# EAGLE board WaterPull (EAGLE 9.6.2)
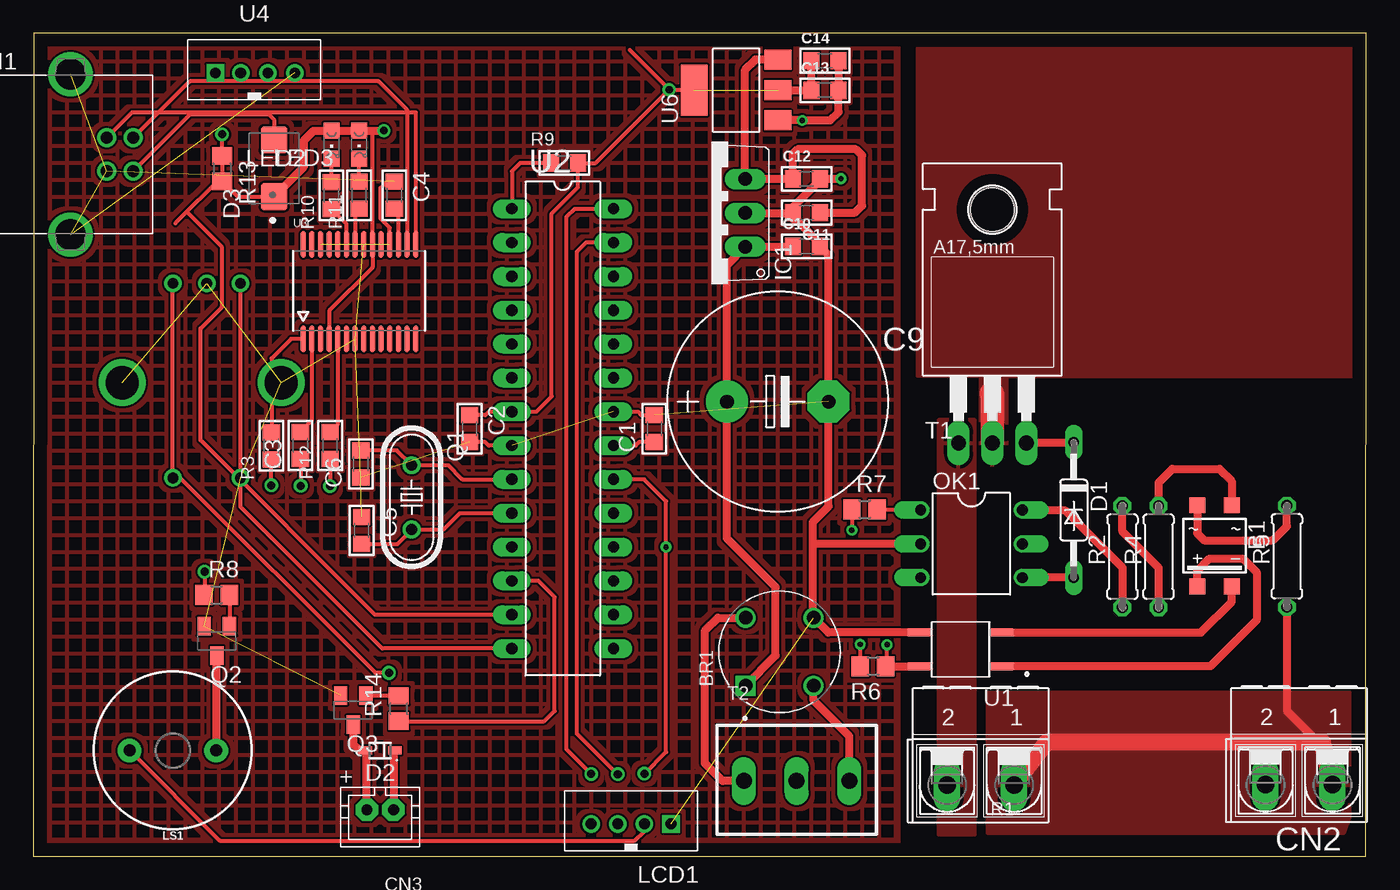
[diagram p0: board, top side]
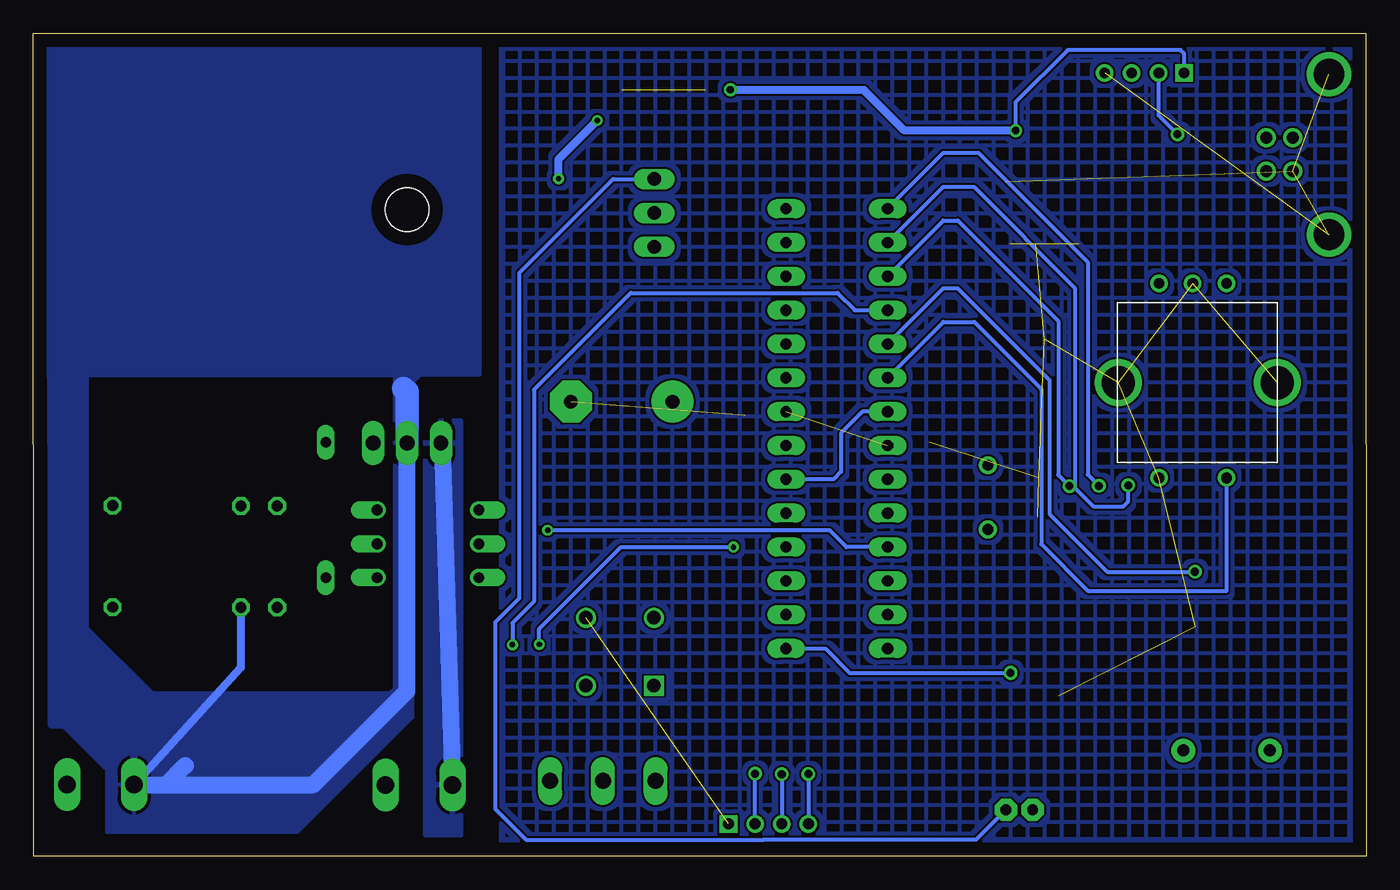
[diagram p1: board, bottom side, seen from below]

Size 100.05 x 61.79 mm. Coordinates in mm from the lower left corner, seen from the top.
Outline: 0,0 100,0 100.05,61.79 0.05,61.79 0,0
Copper layers (1*16): Top 0.035mm / dielectric 1.5mm / Bottom 0.035mm
Design rules "default": minimum track width 6mil, minimum drill 0.35mm, track to track 6mil, track to pad 6mil, pad to pad 6mil, via to via 6mil, smd to smd 6mil, copper to edge 40mil, drill to drill 6mil, minimum pad ring 10mil, minimum via ring 8mil, stop-mask expansion 4mil, vias tented up to drill 0mil, thermal gap 10mil
Net classes: 2 gnd: width 0.305 mm, drill 0.559 mm, clearance 0.254 mm

## Footprints (pad centres in the part's own frame; a part is rotated, then mirrored left to right if it is on the bottom)
SOIC-4 = smd 1.2 x 1.2: + 1.3,3.05; - -1.3,3.05; ~1 -1.3,-3.05; ~2 1.3,-3.05
DIOB_W005M = drill 1 square: + -2.55,2.55 | drill 1: - 2.55,-2.55; ~A 2.55,2.55; ~B -2.55,-2.55
C0805 = smd 1.2 x 1.3: 1 -1.016,0; 2 1.016,0
E7,5-16 = drill 1.016 pad 3.15: + -3.81,0 | drill 1.016 pad 3.15 octagon: - 3.81,0
USB-B = drill 0.92 pad 1.27: 1 7.25,-1.25; 2 7.25,1.25; 3 5.25,1.25; 4 5.25,-1.25 | drill 2.3 pad 3: M1 2.54,6.02; M2 2.54,-6.02
AK500/2-H = drill 1.321 long: 1 -2.515,0; 2 2.515,0
JST-PH2 = drill 0.813 pad 1.676 octagon: 1 1,0; 2 -1,0
DO35-10 = drill 0.813 long: A 5.08,0; C -5.08,0
SOD323F = smd 1 x 0.6: A 1.1,0; C -1.1,0
DO214AB = smd 2.06 x 2.02: A 2.125,0; C -2.125,0
TO220V = drill 1.016 long: 1 -2.54,-2.54; 2 0,-2.54; 3 2.54,-2.54
TUXGR_16X2_R2 = drill 0.813 square: 1 3,0 | drill 0.813: 2 1,0; 3 -1,0; 4 -3,0
CHIPLED_0805 = smd 1.2 x 1.2: A 0,-1.05; C 0,1.05
BUZZER-12MM = drill 0.9 pad 1.778: + 3.25,0; - -3.25,0
DIL06 = drill 0.813 offset: 1 -2.54,-3.81; 2 0,-3.81; 3 2.54,-3.81; 4 2.54,3.81; 5 0,3.81; 6 -2.54,3.81
HC49/S = drill 0.813: 1 -2.413,0; 2 2.413,0
SOT23-BEC = smd 1 x 1.4: B -0.95,-1.1; C 0,1.1; E 0.95,-1.1
0207/7 = drill 0.813 octagon: 1 -3.81,0; 2 3.81,0
R0805 = smd 1.2 x 1.3: 1 -1.016,0; 2 1.016,0
R0805' = smd 1.3 x 1.5: 1 -0.95,0; 2 0.95,0
KY-040 = drill 0.8: A 2.54,7.8; B -2.54,7.8; GND 0,7.8; SW1 2.54,-6.8; SW2 -2.54,-6.8 | drill 2.5: CH1 6.35,0.35; CH2 -5.588,0.35
TO220BH = drill 1.118 long: G 2.54,-6.35; T1 -2.54,-6.35; T2 0,-6.35 | hole 3.302: 0,11.176
3PINS = drill 1.2 long: 1 0,-1.016; 2 3.96,-1.016; 3 7.92,-1.016
SOP254P700X200-4N = smd 1.93 x 0.59: 1 -3.04,1.27; 2 -3.04,-1.27; 3 3.04,-1.27; 4 3.04,1.27
DIL28-3 = drill 0.85 pad 1.422 long: 1 -16.51,-3.81; 2 -13.97,-3.81; 3 -11.43,-3.81; 4 -8.89,-3.81; 5 -6.35,-3.81; 6 -3.81,-3.81; 7 -1.27,-3.81; 8 1.27,-3.81; 9 3.81,-3.81; 10 6.35,-3.81; 11 8.89,-3.81; 12 11.43,-3.81; 13 13.97,-3.81; 14 16.51,-3.81; 15 16.51,3.81; 16 13.97,3.81; 17 11.43,3.81; 18 8.89,3.81; 19 6.35,3.81; 20 3.81,3.81; 21 1.27,3.81; 22 -1.27,3.81; 23 -3.81,3.81; 24 -6.35,3.81; 25 -8.89,3.81; 26 -11.43,3.81; 27 -13.97,3.81; 28 -16.51,3.81
SSOP28 = smd 0.381 x 2.032: 1 0,0; 2 0.65,0; 3 1.3,0; 4 1.95,0; 5 2.6,0; 6 3.25,0; 7 3.9,0; 8 4.55,0; 9 5.2,0; 10 5.85,0; 11 6.5,0; 12 7.15,0; 13 7.8,0; 14 8.45,0; 15 8.45,7.112; 16 7.8,7.112; 17 7.15,7.112; 18 6.5,7.112; 19 5.85,7.112; 20 5.2,7.112; 21 4.55,7.112; 22 3.9,7.112; 23 3.25,7.112; 24 2.6,7.112; 25 1.95,7.112; 26 1.3,7.112; 27 0.65,7.112; 28 0,7.112
TEMP-HUM-SENSOR-DHT22 = drill 0.8 square: 1 -2.921,0 | drill 0.8: 2 -1.016,0; 3 1.016,0; 4 3.048,0
SOT223 = smd 1.499 x 2.007: 1 -2.261,-3.15; 2 0.025,-3.15; 3 2.311,-3.15 | smd 3.81 x 2.007: 4 0,3.15

## Placement (x,y rotation side)
B1  MB6S  [SOIC-4]  88.66,23.3 180 top
BR1  W10M  [DIOB_W005M]  56.02,15.35 90 top
C1  100 nF  [C0805]  46.62,32.11 90 top
C2  100 nF  [C0805]  32.75,32.11 270 top
C3  100 nF  [C0805]  20.05,30.84 90 top
C4  100 nF  [C0805]  27.1,49.63 270 top
C5  22 pF  [C0805]  24.65,24.46 270 top
C6  22 pF  [C0805]  24.59,29.45 90 top
C9  2200uF x 25V  [E7,5-16]  55.88,34.14 0 top
C10  100nF  [C0805]  58.04,45.78 0 top
C11  10uF x 16V  [C0805]  58.04,48.32 180 top
C12  100nF  [C0805]  58.04,50.86 0 top
C13  10uF x 16V  [C0805]  59.42,57.51 0 top
C14  100nF  [C0805]  59.42,59.73 0 top
CN1  USB-B  [USB-B]  0.25,52.69 0 top
CN2  127/220VAC  [AK500/2-H]  95.01,5.37 180 top
CN3  12V @ 150mA  [JST-PH2]  26.04,3.49 180 top
D1  DB3  [DO35-10]  78.09,26 270 top
D2  1N4148WS  [SOD323F]  26.04,7.94 180 top
D3  SS34  [DO214AB]  18.07,51.65 90 top
IC1  7812TV  [TO220V]  50.89,48.3 90 top
LCD1  [TUXGR_16X2_R2]  44.87,2.43 0 top
LED2  [CHIPLED_0805]  22.39,53.42 180 top
LED3  [CHIPLED_0805]  24.46,53.44 180 top
LS1  [BUZZER-12MM]  10.48,7.94 180 top
OK1  MOC3020  [DIL06]  70.42,23.46 270 top
Q1  16 MHz  [HC49/S]  28.4,26.95 270 top
Q2  BC817  [SOT23-BEC]  13.78,16.17 180 top
Q3  BC817  [SOT23-BEC]  24.02,10.97 180 top
R1  500W  [AK500/2-H]  71.11,5.35 180 top
R2  1k  [0207/7]  81.75,22.49 90 top
R3  1k  [R0805]  17.88,30.81 90 top
R4  10k  [0207/7]  84.47,22.49 90 top
R5  10k  [0207/7]  94.09,22.52 90 top
R6  10k  [R0805']  63.03,14.26 180 top
R7  220R  [R0805']  62.4,26.05 0 top
R8  2k2  [R0805']  13.77,19.63 0 top
R9  10k  [R0805]  39.87,52.04 0 top
R10  330R  [R0805]  22.38,49.61 90 top
R11  330R  [R0805]  24.46,49.63 90 top
R12  1k  [R0805]  22.28,30.84 90 top
R13  10k  [R0805']  14.17,51.63 270 top
R14  2k2  [R0805']  27.43,11.09 90 top
SW1  KY-040  [KY-040]  13.02,35.2 0 bottom
T1  BTB16-800BW  [TO220BH]  72,37.38 0 top
T2  7.5V + 7.5V @ 500mA  [3PINS]  53.34,6.67 0 top
U1  EL357N  [SOP254P700X200-4N]  69.61,15.53 180 top
U2  ATMEGA328P-PU  [DIL28-3]  39.74,32.11 270 top
U3  FT232RL  [SSOP28]  20.26,38.84 0 top
U4  AM2302 (DHT22)  [TEMP-HUM-SENSOR-DHT22]  16.59,58.81 0 top
U6  REG1117  [SOT223]  52.76,57.51 90 top

## Library data of the parts
B1 = rectifier
BR1 = My-Rectifiers
C1-C6 C10-C14 R3 R9-R12 = My-RLC
C9 = rcl; SPICEPREFIX: C
CN1 = My-Connectors
CN2 = Instrumentos
CN3 = My-Electromechanicals
D1 = diode
D2 D3 = My-Diodes
IC1 = linear
LCD1 = LCD 16X2 i2c; OC_FARNELL: unknown; OC_NEWARK: unknown
LED2 LED3 = led
LS1 = SparkFun-Electromechanical; PROD_ID: COMP-08253; SF_SKU: COM-07950
OK1 = optocoupler; MF: FAIRCHILD SEMICONDUCTOR; MPN: MOC3010-M; OC_FARNELL: 1505423; OC_NEWARK: 72K8892
Q1 = crystal; OC_FARNELL: 1667008; OC_NEWARK: unknown
Q2 Q3 = transistor
R1 = rcl
R2 R4-R8 R13 R14 = rcl; SPICEPREFIX: R
SW1 = rotary-encoder
T1 = triac
T2 = My-Transformers
U1 = EL357N; AVAILABILITY: Bad; DESCRIPTION: Optoisolator Transistor Output 3750Vrms 1 Channel 4-SOP (2.54mm); MF: Everlight Electronics; MP: EL357N(A)(TA)-G; PACKAGE: SOP-4 Everlight; PRICE: None
U2 = SmartPrj
U3 = MySMD2
U4 = diy-modules
U6 = REG1117; AVAILABILITY: Unavailable; DESCRIPTION: LDO Regulator Pos 1.25V to 13.5V 0.8A 4-Pin_3+Tab_ SOT-223 Tube; MF: Texas Instruments; MP: REG1117; PACKAGE: SOT-223-4 Texas Instruments; PRICE: None

## Nets
0V: BR1.- C1.2 C2.2 C4.1 C5.1 C6.1 C9.- C10.2 C11.2 C12.2 C13.2 C14.2 CN1.4 CN1.M1 CN1.M2 IC1.2 LCD1.1 OK1.2 Q2.E Q3.E SW1.CH1 SW1.CH2 SW1.GND SW1.SW2 U1.3 U2.8 U2.22 U3.7 U3.18 U3.21 U3.25 U3.26 U4.4 U6.1
0VAC: CN2.1 R1.1 R5.1
1WIRE_TEMPERATURE_SENSOR: R13.1 U2.13 U4.2
5V: C2.1 C13.1 C14.1 D3.C LCD1.2 LED2.A LED3.A LS1.+ R6.2 R9.2 R13.2 U2.7 U2.20 U3.4 U3.20 U4.1 U6.2 U6.4
12VDC: C11.1 C12.1 CN3.2 D2.C IC1.3 U6.3
127VAC: CN2.2 R2.2 R4.1 T1.T2
A1: R1.2 T1.T1
AREF: C1.1 U2.21
D10: U2.16
D11: U2.17
D12: U2.18
D13: U2.19
GND1: BR1.~B T2.3
GPIO_BUZZER: R8.1 U2.5
GPIO_ROTARY_ENCODER_SIGNAL-A: SW1.A U2.15
GPIO_ROTARY_ENCODER_SIGNAL-B: SW1.B U2.14
GPIO_ROTARY_ENCODER_SWITCH: SW1.SW1 U2.6
GPIO_ZERO_CROSSING: R6.1 U1.4 U2.4
I2C_LCD_SCL: LCD1.4 U2.28
I2C_LCD_SDA: LCD1.3 U2.27
MCU_RESET: C3.1 R9.1 U2.1
N$1: D1.A OK1.4
N$2: D1.C T1.G
N$3: B1.~1 R4.2
N$4: B1.~2 R5.2
N$5: B1.+ U1.1
N$6: B1.- U1.2
N$7: R3.2 U3.1
N$9: OK1.6 R2.1
N$10: OK1.1 R7.2
N$11: LS1.- Q2.C
N$12: R12.2 U3.5
N$13: BR1.+ C9.+ C10.1 IC1.1
N$24: C3.2 U3.2
N$25: R10.1 U3.23
N$26: LED2.C R10.2
N$28: LED3.C R11.2
N$29: C5.2 Q1.2 U2.10
N$30: C6.2 Q1.1 U2.9
N$31: R11.1 U3.22
N$32: C4.2 U3.17
N$33: CN1.2 U3.16
N$34: CN1.3 U3.15
N$35: Q2.B R8.2
N$37: CN3.1 D2.A Q3.C
N$39: Q3.B R14.2
N$42: BR1.~A T2.1
PWM_COOLER: R14.1 U2.12
PWM_HEATER: R7.1 U2.11
UART_MCU_RX: R3.1 U2.2
UART_MCU_TX: R12.1 U2.3
VUSB: CN1.1 D3.A

## Tracks (layer width: path | path; a pad name or v marks a point on that pad's centre or on a via)
0V  (via drill 0.4)  (20 unrouted)
  Top 0.305: U3.18 26.75,47.18 26.06,47.88 26.06,50.16 26.54,50.65 C4.1 | U2.22 45.38,33.38 45.63,33.12 C1.2 | U2.8 34.18,30.84 33.92,31.09 C2.2
  Top 0.61: 58.52,23.34 58.52,17.95 BR1.- 59.67,16.8 U1.3 | 58.52,23.34 58.52,25.09 59.69,26.26 C9.- 59.69,45.15 C10.2 59.05,46.01 57,48.07 57,48.3 | IC1.2 57,48.3 | 57,48.3 C11.2 | C11.2 57.02,47.82 | OK1.2 58.64,23.46 58.52,23.34 | C11.2 57.02,48.73 59.05,50.76 C12.2 60.62,50.86 v60.63,50.88 | C14.2 C13.2 60.44,55.87 59.82,55.24 v57.71,55.24 U6.1
  Bottom 0.61: v60.63,50.88 60.63,52.32 v57.71,55.24
0VAC
  Top 0.61: R5.1 94.09,10.93 96.76,8.27 CN2.1
  Top 1.27: CN2.1 96.76,8.57 76.08,8.57 R1.1
  pour Top: 98.81,2.95 98.81,12.27 71.6,12.27 71.6,1.78 98.4,1.78 98.81,2.95
1WIRE_TEMPERATURE_SENSOR  (via drill 0.61)
  Top 0.305: U2.13 25.65,18.14 12.55,31.24 12.55,39.62 14.14,41.21 14.14,45.78 11.53,48.38 | 10.67,47.52 14.17,51.03 R13.1 v14.17,54.2
  Bottom 0.305: v14.17,54.2 15.57,55.6 U4.2
5V  (via drill 0.4, 0.55, 0.61)  (1 unrouted)
  Top 0.305: 25.46,54.47 U3.20 25.46,44.2 22.21,40.95 U3.4 | 24.49,54.47 LED3.A | C2.1 33.95,33.12 34.2,33.38 U2.7 37.76,33.38 38.91,34.53 38.91,48.26 40.88,50.23 R9.2 42.22,52.05 v47.73,57.56 47.75,57.56 | R6.2 v62.08,15.9 | U2.20 45.85,28.3 47.5,26.64 v47.5,23.22 47.5,7.82 v45.87,6.19 | 47.75,57.56 49.55,57.56 | LS1.+ 14,1.17 45.15,1.17 45.87,1.89 LCD1.2 | R13.2 14.21,50.67 15.35,49.53 D3.C | 44.78,60.53 47.75,57.56
  Top 0.61: U6.2 58.38,57.53 C13.1 C14.1 | D3.C 20.32,51.77 20.32,53.75 21.04,54.47 LED2.A 24.49,54.47 25.46,54.47 | LED3.A 26.31,54.49 v26.31,54.48 | 49.55,57.56 U6.4
  Bottom 0.305: v62.08,15.9 62.08,17.07 55.93,23.22 v47.5,23.22 | U2.7 37.82,33.38 39.42,31.77 39.42,28.88 40.01,28.3 U2.20 | LCD1.2 v45.87,6.19 | U4.1 13.66,60.25 13.95,60.53 22.4,60.53 26.31,56.62 v26.31,54.48
  Bottom 0.61: v26.31,54.48 34.65,54.48 37.69,57.53 47.73,57.53 v47.73,57.56
12VDC
  Top 0.61: D2.C 27.11,7.94 27.04,7.86 CN3.2 | C12.1 57,50.84 | 57,50.84 IC1.3 53.43,59.04 54.2,59.82 U6.3 | C11.1 61.68,48.32 62.2,48.84 62.2,52.63 61.75,53.09 57.38,53.09 57,52.7 57,50.84
  Bottom 0.305: CN3.2 29.28,1.25 45.21,1.25 | 45.21,1.25 63.06,1.25 65.35,3.54 65.35,17.58 63.55,19.38 63.55,43.81 56.53,50.84 IC1.3 | 45.21,1.25
127VAC
  Top 0.61: R4.1 84.47,21.65 81.75,24.37 R2.2
  Top 1.778: T1.T2 72,34.72 71.91,34.72
  Bottom 0.61: R4.1 84.47,14.16 CN2.2
  Bottom 1.27: 88.63,6.82 90.08,5.37 CN2.2 79.03,5.37 72,12.41 T1.T2
  Bottom 1.778: T1.T2 72,34.89 72.24,35.13
  pour Bottom: 71.58,35.57 70.99,36.17 66.52,36.17 66.52,61.7 100.08,61.7 100.08,36.14 72.95,36.14 72.95,12.57 73.3,12.22 88.82,12.22 94.54,6.5 94.54,1.83 80.21,1.83 71.58,10.46
  pour Top: 66.4,36.07 66.4,60.63 99.06,60.63 99.06,36.02 73.05,36.02 73.05,29.39 71.12,29.39 71.12,36.07
  pour Bottom: 86.46,12.06 91.16,12.06 96.14,17.04 96.14,36.63 98.73,36.63 98.73,9.91 97.71,9.91 94.54,6.73 91.8,6.73
A1
  Bottom 1.27: T1.T1 69.36,30.93 R1.2
  pour Top: 70.66,32.74 67.94,32.74 67.94,1.63 68.07,1.65 70.66,1.63
  pour Bottom: 68,1.6 70.61,1.6 70.61,32.66 68,32.66
AREF
  Top 0.305: U2.21 45.21,30.84 45.47,31.09 C1.1
GND1
  Top 0.61: T2.3 61.26,9 58.57,11.7 BR1.~B
GPIO_BUZZER  (via drill 0.61)
  Top 0.305: v12.85,21.36 12.85,19.67 R8.1
  Bottom 0.305: U2.5 31.74,42.65 30.68,42.65 23.77,35.74 23.77,25.7 19.43,21.36 v12.85,21.36
GPIO_ROTARY_ENCODER_SIGNAL-A  (via drill 0.61)
  Top 0.305: SW1.A 10.48,28.97 25.68,13.77 v26.7,13.77
  Bottom 0.305: U2.15 40.6,15.6 38.77,13.77 v26.7,13.77
GPIO_ROTARY_ENCODER_SIGNAL-B
  Top 0.305: U2.14 26.19,15.6 15.56,26.23 SW1.B
GPIO_ROTARY_ENCODER_SWITCH
  Bottom 0.305: U2.6 31.74,40.11 29.41,40.11 24.38,35.08 24.38,23.44 20.88,19.94 10.48,19.94 SW1.SW1
GPIO_ZERO_CROSSING  (via drill 0.4)
  Top 0.305: R6.1 64.08,14.37 v64.08,15.88
  Top 0.61: R6.1 U1.4
  Bottom 0.305: U2.4 38.39,41 39.69,42.29 55.22,42.29 62.47,35.04 62.47,19.12 64.08,17.51 v64.08,15.88
I2C_LCD_SCL  (via drill 0.61)
  Top 0.305: U2.28 40.65,48.62 40.01,47.97 40.01,8.05 v41.87,6.18
  Bottom 0.305: v41.87,6.18 LCD1.4
I2C_LCD_SDA  (via drill 0.61)
  Top 0.305: U2.27 41.5,46.08 40.79,45.36 40.79,9.24 v43.87,6.16
  Bottom 0.305: v43.87,6.16 LCD1.3
MCU_RESET  (via drill 0.61)
  Top 0.305: R9.1 36.55,52.05 35.93,51.42 U2.1 | C3.1 20.05,27.83 v20.07,27.81
  Bottom 0.305: v20.07,27.81 20.9,28.65 20.9,44.6 29.11,52.81 31.74,52.81 U2.1
N$1
  Top 0.61: D1.A OK1.4
N$2
  Top 0.61: D1.C 78.04,31.03 T1.G
N$3
  Top 0.61: R4.2 84.47,28.05 85.5,29.08 89.03,29.08 89.96,28.16 B1.~1
N$4
  Top 0.61: B1.~2 87.36,24.25 87.88,23.72 93.04,23.72 94.09,24.78 R5.2
N$5
  Top 0.61: B1.+ 87.36,21.42 88.29,22.35 90.78,22.35 91.82,21.31 91.82,17.73 88.35,14.26 U1.1
N$6
  Top 0.61: U1.2 87.65,16.8 89.96,19.11 B1.-
N$7
  Top 0.305: U3.1 19.34,38.84 17.88,37.38 R3.2
N$9
  Top 0.61: OK1.6 77.43,26 81.75,21.68 R2.1
N$10
  Top 0.305: R7.2 66.56,26.05 OK1.1
N$11
  Top 0.61: LS1.- 13.78,7.99 Q2.C
N$12
  Top 0.305: U3.5 22.86,32.43 R12.2
N$13
  Top 0.61: BR1.+ 55.73,15.06 55.73,20.22 52.07,23.88 C9.+ 52.07,44.4 IC1.1 57,45.76 C10.1
N$24
  Top 0.305: U3.2 20.91,32.7 C3.2
N$25
  Top 0.305: U3.23 23.51,47.46 R10.1
N$26
  Top 0.305: R10.2 22.38,52.35 LED2.C
N$28
  Top 0.305: R11.2 LED3.C
N$29
  Top 0.305: U2.10 32.02,25.76 30.8,24.54 Q1.2 28.4,24.5 27.34,23.44 C5.2
N$30
  Top 0.305: U2.9 32.19,28.3 31.13,29.36 Q1.1 28.38,29.36 27.28,30.47 C6.2
N$31
  Top 0.305: R11.1 24.16,48.31 U3.22
N$32
  Top 0.305: U3.17 27.41,48.31 C4.2
N$33
  Top 0.305: U3.16 28.06,56.04 25.91,58.18 11.75,58.18 CN1.2
N$34
  Top 0.305: CN1.3 7.42,55.85 28.71,55.85 U3.15
N$35
  Top 0.305: Q2.B 14.74,17.26 14.74,19.61 R8.2
N$37
  Top 0.61: Q3.C 24.02,8.4 24.48,7.94 D2.A 25.04,7.84 CN3.1
N$39
  Top 0.305: Q3.B 27.4,12.07 R14.2
N$42
  Top 0.61: T2.1 51.74,5.65 50.39,7 50.39,16.91 51.39,17.9 BR1.~A
OV
  pour Top (hatched): 0.05,61.7 64.92,61.7 64.92,-0.08 0.05,-0.08
  pour Bottom (hatched): 64.95,61.67 0.08,61.67 0.08,-0.1 64.95,-0.1
PWM_COOLER
  Top 0.305: R14.1 38.36,10.14 39.13,10.91 39.13,19.47 37.92,20.68 U2.12
PWM_HEATER  (via drill 0.4)
  Top 0.305: R7.1 v61.44,24.49
  Bottom 0.305: U2.11 39.03,23.22 40.3,24.49 v61.44,24.49
UART_MCU_RX  (via drill 0.61)
  Top 0.305: v17.86,27.84 17.86,29.77 R3.1
  Bottom 0.305: U2.2 31.74,50.27 29.46,50.27 21.87,42.67 21.87,27.64 20.5,26.26 18.21,26.26 17.86,26.62 v17.86,27.84
UART_MCU_TX  (via drill 0.61)
  Top 0.305: R12.1 v22.28,27.79
  Bottom 0.305: v22.28,27.79 23.11,28.63 23.11,40.18 30.66,47.73 31.74,47.73 U2.3
VUSB
  Top 0.305: CN1.1 11.75,55.68 17.7,55.68 18.07,55.31 D3.A